# Altium PCB PCB_3U_RJ45.PCBDOC (part 2 of 2)
Units mil, origin at the board's own origin, x right, y up, seen from the top; angles counter-clockwise.
Board outline 2496.06 x 3937 mil, 4 copper layers (TopLayer, MidLayer2, Internal Plane 1, BottomLayer), stack 44.239 mil thick; 232 components, 140 nets, 824 pads, 257 vias.
Unrouted connection lines stored in the file: 421.
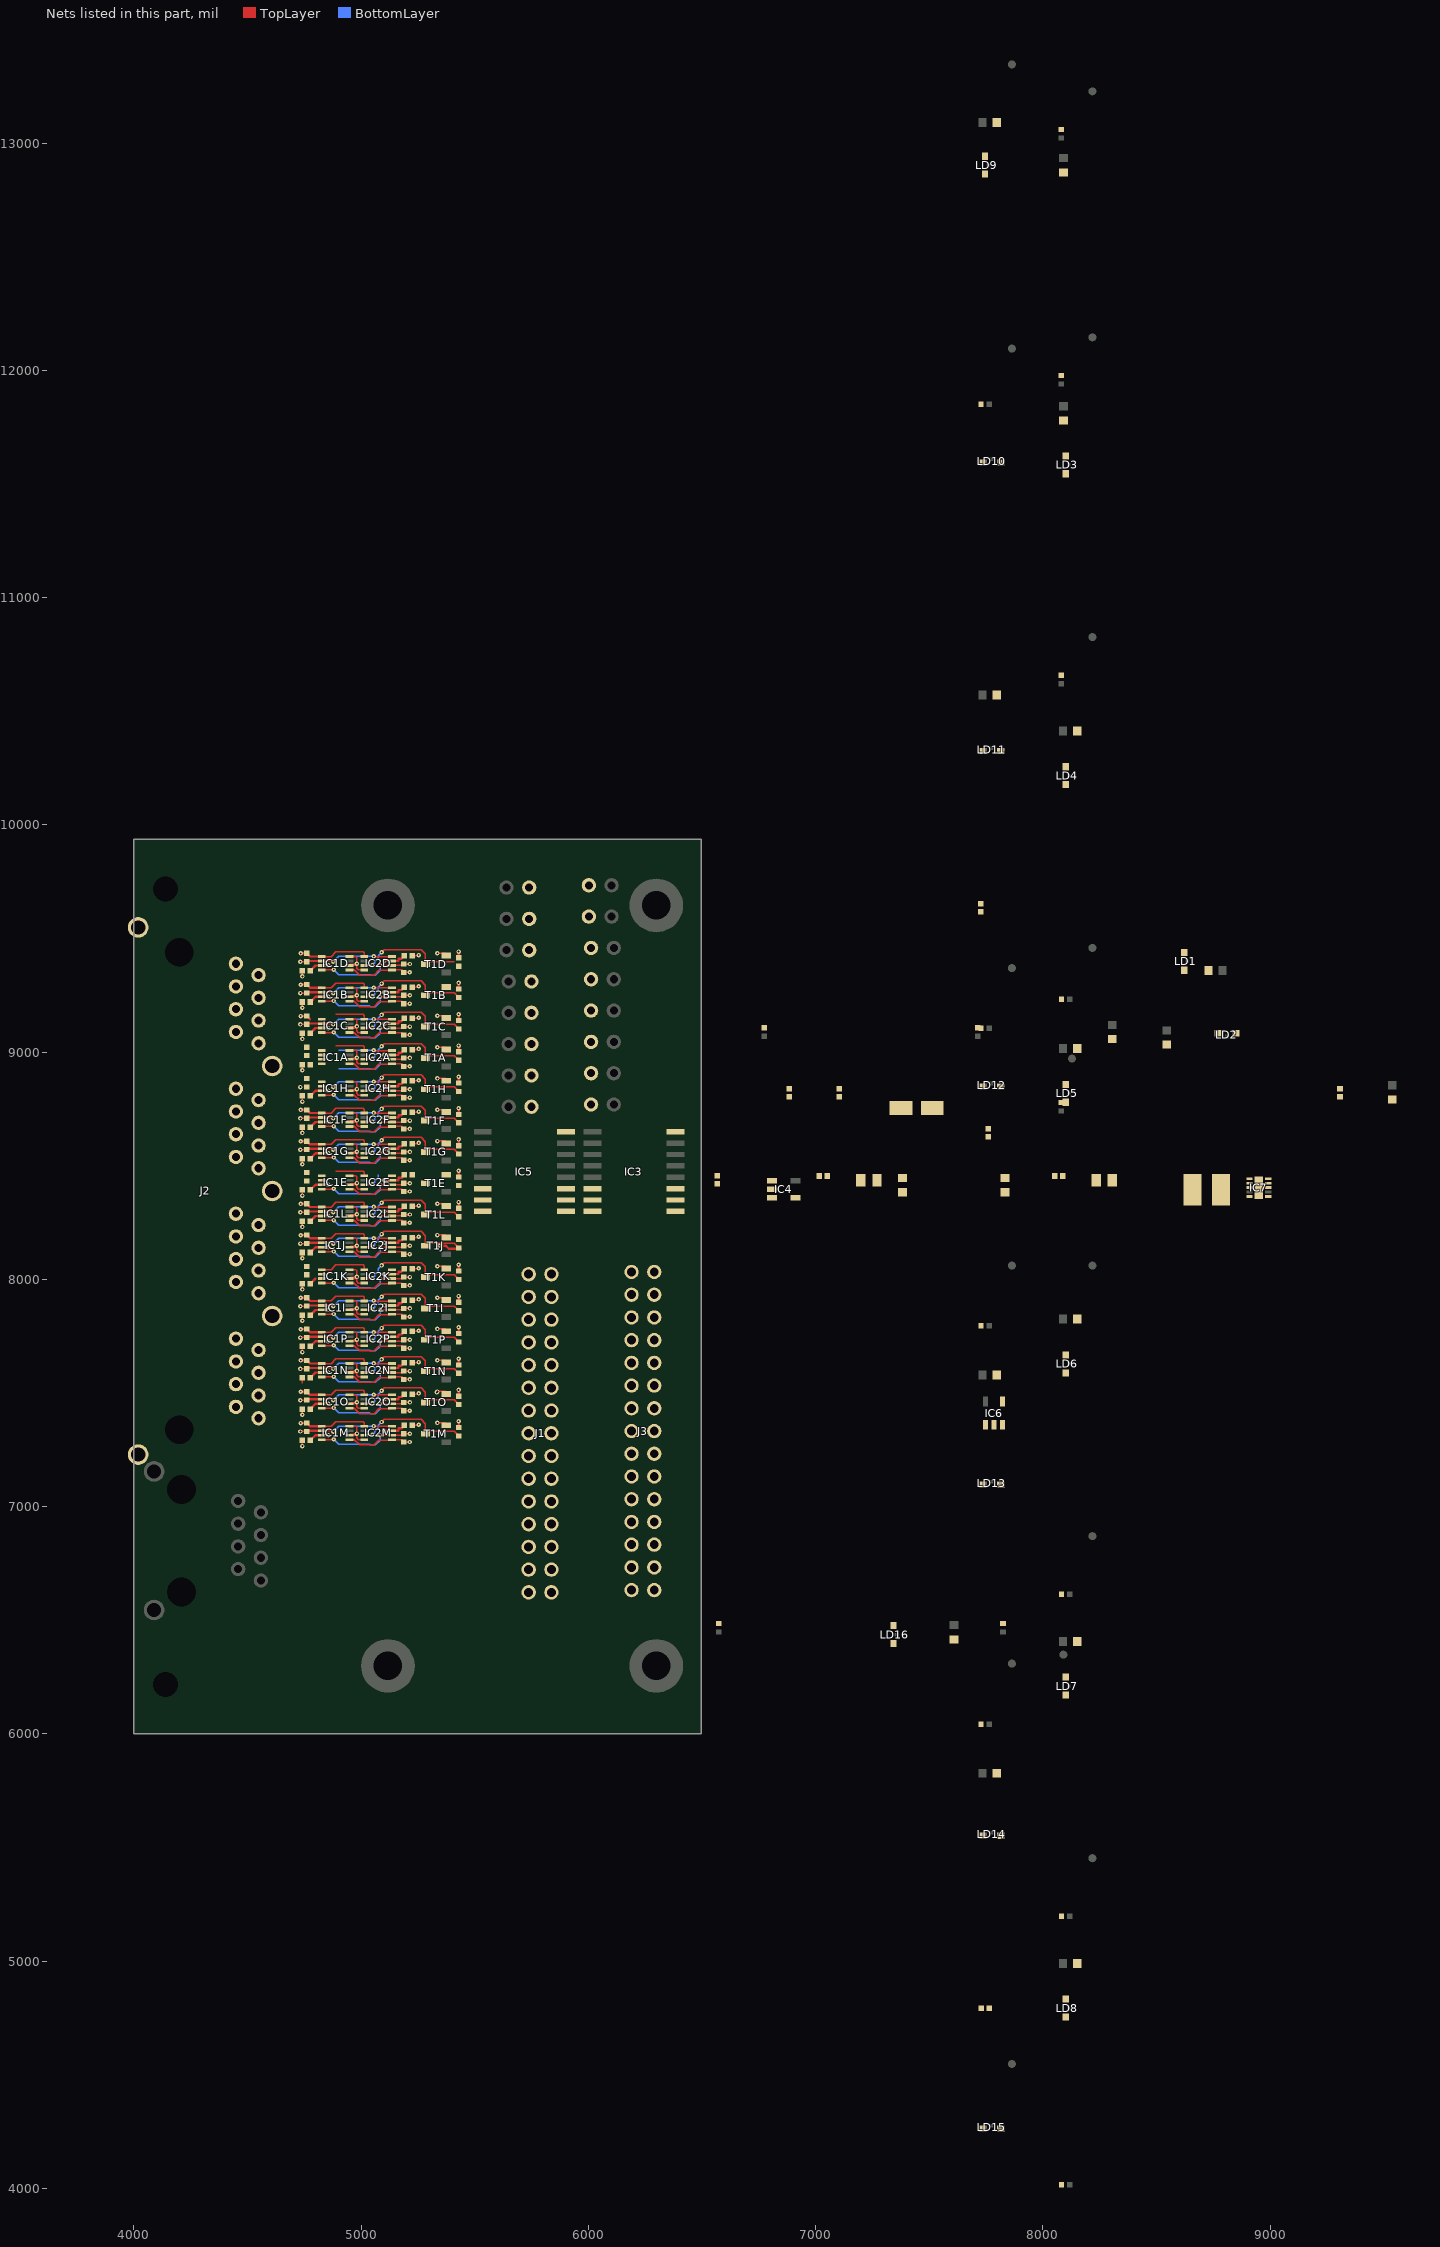
[diagram p3: the nets of this part, all layers, seen from the top]

## Via types
v1: diameter 19.68, hole 7.87, TopLayer to BottomLayer, 257 vias

## Nets (pads, with @x,y where several pads share a name; then routed paths per layer and width w, separated by ;. In a path a pad name is that pad's centre, name@x,y a point inside that pad or via, vN(x,y) a via of type N, cw(c..) or ccw(c..) an arc to the next point about the centre after c; other vN are vias at no path point) (continued)
GND: C1A.1 C1B.1 C1C.1 C1D.1 C1E.1 C1F.1 C1G.1 C1H.1 C1I.1 C1J.1 C1K.1 C1L.1 C1M.1 C1N.1 C1O.1 C1P.1 C2A.1 C2B.1 C2C.1 C2D.1 C2E.1 C2F.1 C2G.1 C2H.1 C2I.1 C2J.1 C2K.1 C2L.1 C2M.1 C2N.1 C2O.1 C2P.1 C3.1 C4.1 C5.1 C6.1 C7.1 C8.2 C9.1 C10.1 C11.1 C12.1 C13.1 C14.1 IC1A.2 IC1A.4 IC1B.2 IC1B.4 IC1C.2 IC1C.4 IC1D.2 IC1D.4 IC1E.2 IC1E.4 IC1F.2 IC1F.4 IC1G.2 IC1G.4 IC1H.2 IC1H.4 IC1I.2 IC1I.4 IC1J.2 IC1J.4 IC1K.2 IC1K.4 IC1L.2 IC1L.4 IC1M.2 IC1M.4 IC1N.2 IC1N.4 IC1O.2 IC1O.4 IC1P.2 IC1P.4 IC2A.4 IC2B.4 IC2C.4 IC2D.4 IC2E.4 IC2F.4 IC2G.4 IC2H.4 IC2I.4 IC2J.4 IC2K.4 IC2L.4 IC2M.4 IC2N.4 IC2O.4 IC2P.4 IC3.1 IC3.8 IC4.2 IC5.1 IC5.8 IC6.2 IC7.1 IC7.6 IC7.11 J1.1 J1.4 J1.7 J1.10 J1.13 J1.16 J1.19 J1.22 J1.25 J2.SH J3.1 J3.4 J3.7 J3.10 J3.13 J3.16 J3.19 J3.22 J3.25 R37.1 T1A.2 T1B.2 T1C.2 T1D.2 T1E.2 T1F.2 T1G.2 T1H.2 T1I.2 T1J.2 T1K.2 T1L.2 T1M.2 T1N.2 T1O.2 T1P.2 W1.2 W3.2 W5.2 W7.2 W9.2 W11.2 W13.2 W15.2 W17.2 W19.2 W21.2 W23.2 W25.2 W27.2 W29.2 W31.2 | length 4300.4
  TopLayer w6: C2M.1@4741.38,7291.61 4741.38,7267.33 v1(4742.09,7266.61) ; C2O.1@4741.38,7429.41 4741.38,7405.13 v1(4742.09,7404.41) ; 4741.38,7542.92 C2N.1@4741.38,7567.2 ; C2P.1@4741.38,7705 4741.38,7680.72 v1(4742.09,7680) ; C2I.1@4741.38,7842.8 4741.38,7818.51 v1(4742.09,7817.8) ; C2K.1@4741.38,7980.59 4741.38,7956.31 v1(4742.09,7955.59) ; C2J.1@4741.38,8118.39 4741.38,8094.1 v1(4742.09,8093.39) ; C2L.1@4741.38,8256.18 4741.38,8231.9 v1(4742.09,8231.18) ; C2E.1@4741.38,8393.98 4741.38,8369.69 v1(4742.09,8368.98) ; C2G.1@4741.38,8531.77 4741.38,8507.49 v1(4742.09,8506.77) ; C2F.1@4741.38,8669.57 4741.38,8645.28 v1(4742.09,8644.57) ; C2H.1@4741.38,8807.36 4741.38,8783.08 v1(4742.09,8782.36) ; C2A.1@4741.38,8945.16 4741.38,8920.87 v1(4742.09,8920.16) ; C2C.1@4741.38,9082.95 4741.38,9058.67 v1(4742.09,9057.95) ; C2B.1@4741.38,9220.75 4741.38,9196.46 v1(4742.09,9195.75) ; C2D.1@4741.38,9358.54 4741.38,9334.26 v1(4742.09,9333.54) ; IC1M.4@4949.12,7353.98 4977.57,7353.98 4980.09,7351.46 4980.09,7323.04 v1(4981.5,7321.63) v1@4980.09,7320.23 ; IC1O.4@4949.12,7491.78 4977.57,7491.78 4980.09,7489.25 4980.09,7460.83 v1(4981.5,7459.43) v1@4980.09,7458.03 ; IC1N.4@4949.12,7629.57 4977.57,7629.57 4980.09,7627.05 4980.09,7598.63 v1(4981.5,7597.23) v1@4980.09,7595.82 ; IC1P.4@4949.12,7767.37 4977.57,7767.37 4980.09,7764.84 4980.09,7736.42 v1(4981.5,7735.02) v1@4980.09,7733.62 ; IC1I.4@4949.12,7905.17 4977.57,7905.17 4980.09,7902.64 4980.09,7874.22 v1(4981.5,7872.82) v1@4980.09,7871.41 ; IC1K.4@4949.12,8042.96 4977.57,8042.96 4980.09,8040.43 4980.09,8012.01 v1(4981.5,8010.61) v1@4980.09,8009.21 ; IC1J.4@4949.12,8180.76 4977.57,8180.76 4980.09,8178.23 4980.09,8149.81 v1(4981.5,8148.41) v1@4980.09,8147.01 ; IC1L.4@4949.12,8318.55 4977.57,8318.55 4980.09,8316.02 4980.09,8287.6 v1(4981.5,8286.2) v1@4980.09,8284.8 ; IC1E.4@4949.12,8456.35 4977.57,8456.35 4980.09,8453.82 4980.09,8425.4 v1(4981.5,8424) v1@4980.09,8422.6 ; IC1G.4@4949.12,8594.14 4977.57,8594.14 4980.09,8591.61 4980.09,8563.19 v1(4981.5,8561.79) v1@4980.09,8560.39 ; IC1F.4@4949.12,8731.94 4977.57,8731.94 4980.09,8729.41 4980.09,8700.99 v1(4981.5,8699.59) v1@4980.09,8698.19 ; IC1H.4@4949.12,8869.73 4977.57,8869.73 4980.09,8867.2 4980.09,8838.78 v1(4981.5,8837.38) v1@4980.09,8835.98 ; IC1A.2@4949.12,8968.16 4974.48,8968.16 v1@4979.25,8972.94 ; IC1A.4@4949.12,9007.53 4977.57,9007.53 4980.09,9005 4980.09,8976.58 v1(4981.5,8975.18) v1@4980.09,8973.78 ; IC1C.4@4949.12,9145.32 4977.57,9145.32 4980.09,9142.8 4980.09,9114.38 v1(4981.5,9112.97) v1@4980.09,9111.57 ; IC1B.4@4949.12,9283.12 4977.57,9283.12 4980.09,9280.59 4980.09,9252.17 v1(4981.5,9250.77) v1@4980.09,9249.37 ; IC1D.4@4949.12,9420.91 4977.57,9420.91 4980.09,9418.39 4980.09,9389.97 v1(4981.5,9388.56) v1@4980.09,9387.16 ; IC1A.2@4953.9,8972.94 v1@4979.25,8972.94 ; IC2M.4@5014.07,7294.93 4987.62,7294.93 4980.09,7302.46 v1@4980.09,7320.23 ; IC2O.4@5014.07,7432.72 4987.62,7432.72 4980.09,7440.25 v1@4980.09,7458.03 ; IC2N.4@5014.07,7570.52 4987.62,7570.52 4980.09,7578.05 v1@4980.09,7595.82 ; IC2P.4@5014.07,7708.31 4987.62,7708.31 4980.09,7715.84 v1@4980.09,7733.62 ; IC2I.4@5014.07,7846.11 4987.62,7846.11 4980.09,7853.64 v1@4980.09,7871.41 ; IC2K.4@5014.07,7983.91 4987.62,7983.91 4980.09,7991.43 v1@4980.09,8009.21 ; IC2J.4@5014.07,8121.7 4987.62,8121.7 4980.09,8129.23 v1@4980.09,8147.01 ; IC2L.4@5014.07,8259.5 4987.62,8259.5 4980.09,8267.02 v1@4980.09,8284.8 ; IC2E.4@5014.07,8397.29 4987.62,8397.29 4980.09,8404.82 v1@4980.09,8422.6 ; IC2G.4@5014.07,8535.09 4987.62,8535.09 4980.09,8542.61 v1@4980.09,8560.39 ; IC2F.4@5014.07,8672.88 4987.62,8672.88 4980.09,8680.41 v1@4980.09,8698.19 ; IC2H.4@5014.07,8810.68 4987.62,8810.68 4980.09,8818.2 v1@4980.09,8835.98 ; IC2A.4@5014.07,8948.47 4987.62,8948.47 4980.09,8956 v1@4980.09,8973.78 ; IC2C.4@5014.07,9086.27 4987.62,9086.27 4980.09,9093.8 v1@4980.09,9111.57 ; IC2B.4@5014.07,9224.06 4987.62,9224.06 4980.09,9231.59 v1@4980.09,9249.37 ; IC2D.4@5014.07,9361.86 4987.62,9361.86 4980.09,9369.39 v1@4980.09,9387.16 ; C1M.1@5225.81,7357.46 5253.09,7357.46 5254.09,7358.46 v1(5254.09,7360.46) ; C1O.1@5225.81,7495.25 5253.09,7495.25 5254.09,7496.25 v1(5254.09,7498.25) ; C1N.1@5225.81,7633.05 5253.09,7633.05 5254.09,7634.05 v1(5254.09,7636.05) ; C1P.1@5225.81,7770.84 5253.09,7770.84 5254.09,7771.84 v1(5254.09,7773.84) ; C1I.1@5225.81,7908.64 5253.09,7908.64 5254.09,7909.64 v1(5254.09,7911.64) ; C1K.1@5225.81,8046.43 5253.09,8046.43 5254.09,8047.43 v1(5254.09,8049.43) ; C1J.1@5225.81,8184.23 5253.09,8184.23 5254.09,8185.23 v1(5254.09,8187.23) ; C1L.1@5225.81,8322.02 5253.09,8322.02 5254.09,8323.02 v1(5254.09,8325.02) ; C1G.1@5225.81,8597.61 5253.09,8597.61 5254.09,8598.61 v1(5254.09,8600.61) ; C1F.1@5225.81,8735.41 5253.09,8735.41 5254.09,8736.41 v1(5254.09,8738.41) ; C1H.1@5225.81,8873.2 5253.09,8873.2 5254.09,8874.2 v1(5254.09,8876.2) ; C1A.1@5225.81,9011 5253.09,9011 5254.09,9012 v1(5254.09,9014) ; C1C.1@5225.81,9148.8 5253.09,9148.8 5254.09,9149.8 v1(5254.09,9151.8) ; C1B.1@5225.81,9286.59 5253.09,9286.59 5254.09,9287.59 v1(5254.09,9289.59) ; C1D.1@5225.81,9424.39 5253.09,9424.39 5254.09,9425.39 v1(5254.09,9427.39) ; v1@5331.93,7503.55 v1(5332.65,7502.83) ; v1(5336.09,7368.46) 5336.5,7368.86 T1M.2@5373.37,7368.86 ; v1(5336.09,7506.25) 5336.5,7506.65 T1O.2@5373.37,7506.65 ; v1(5336.09,7644.05) 5336.5,7644.45 T1N.2@5373.37,7644.45 ; v1(5336.09,7781.84) 5336.5,7782.24 T1P.2@5373.37,7782.24 ; v1(5336.09,7919.64) 5336.5,7920.04 T1I.2@5373.37,7920.04 ; v1(5336.09,8057.43) 5336.5,8057.83 T1K.2@5373.37,8057.83 ; v1(5336.09,8333.02) 5336.5,8333.43 T1L.2@5373.37,8333.43 ; v1(5336.09,8608.61) 5336.5,8609.02 T1G.2@5373.37,8609.02 ; v1(5336.09,8746.41) 5336.5,8746.81 T1F.2@5373.37,8746.81 ; v1(5336.09,8884.2) 5336.5,8884.61 T1H.2@5373.37,8884.61 ; v1(5336.09,9022) 5336.5,9022.4 T1A.2@5373.37,9022.4 ; v1(5336.09,9159.8) 5336.5,9160.2 T1C.2@5373.37,9160.2 ; v1(5336.09,9435.39) 5336.5,9435.79 T1D.2@5373.37,9435.79 ; v1@4979.25,7319.39 4953.9,7319.39 IC1M.2@4949.12,7314.61 4974.48,7314.61 v1@4979.25,7319.39 ; v1@4979.25,7319.39 v1@4980.09,7320.23 ; v1@4979.25,7457.19 4974.48,7452.41 IC1O.2@4949.12,7452.41 4953.9,7457.19 v1@4979.25,7457.19 ; v1@4979.25,7457.19 v1@4980.09,7458.03 ; v1@4979.25,7594.98 4974.48,7590.2 IC1N.2@4949.12,7590.2 4953.9,7594.98 v1@4979.25,7594.98 ; v1@4979.25,7594.98 v1@4980.09,7595.82 ; v1@4979.25,7732.78 4974.48,7728 IC1P.2@4949.12,7728 4953.9,7732.78 v1@4979.25,7732.78 ; v1@4979.25,7732.78 v1@4980.09,7733.62 ; v1@4979.25,7870.57 4974.48,7865.8 IC1I.2@4949.12,7865.8 4953.9,7870.57 v1@4979.25,7870.57 ; v1@4979.25,7870.57 v1@4980.09,7871.41 ; v1@4979.25,8008.37 4974.48,8003.59 IC1K.2@4949.12,8003.59 4953.9,8008.37 v1@4979.25,8008.37 ; v1@4979.25,8008.37 v1@4980.09,8009.21 ; v1@4979.25,8146.17 4974.48,8141.39 IC1J.2@4949.12,8141.39 4953.9,8146.17 v1@4979.25,8146.17 ; v1@4979.25,8146.17 v1@4980.09,8147.01 ; v1@4979.25,8283.96 4974.48,8279.18 IC1L.2@4949.12,8279.18 4953.9,8283.96 v1@4979.25,8283.96 ; v1@4979.25,8283.96 v1@4980.09,8284.8 ; v1@4979.25,8421.76 4974.48,8416.98 IC1E.2@4949.12,8416.98 4953.9,8421.76 v1@4979.25,8421.76 ; v1@4979.25,8421.76 v1@4980.09,8422.6 ; v1@4979.25,8559.55 4974.48,8554.77 IC1G.2@4949.12,8554.77 4953.9,8559.55 v1@4979.25,8559.55 ; v1@4979.25,8559.55 v1@4980.09,8560.39 ; v1@4979.25,8697.35 4974.48,8692.57 IC1F.2@4949.12,8692.57 4953.9,8697.35 v1@4979.25,8697.35 ; v1@4979.25,8697.35 v1@4980.09,8698.19 ; v1@4979.25,8835.14 4974.48,8830.36 IC1H.2@4949.12,8830.36 4953.9,8835.14 v1@4979.25,8835.14 ; v1@4979.25,8835.14 v1@4980.09,8835.98 ; v1@4979.25,8972.94 v1@4980.09,8973.78 ; v1@4979.25,9110.73 4974.48,9105.95 IC1C.2@4949.12,9105.95 4953.9,9110.73 v1@4979.25,9110.73 ; v1@4979.25,9110.73 v1@4980.09,9111.57 ; v1@4979.25,9248.53 4974.48,9243.75 IC1B.2@4949.12,9243.75 4953.9,9248.53 v1@4979.25,9248.53 ; v1@4979.25,9248.53 v1@4980.09,9249.37 ; v1@4979.25,9386.32 4974.48,9381.54 IC1D.2@4949.12,9381.54 4953.9,9386.32 v1@4979.25,9386.32 ; v1@4979.25,9386.32 v1@4980.09,9387.16
I2C1_SCL: IC3.14 IC4.1 J1.27
I2C1_SDA: IC3.15 IC4.3 J1.26
I2C2_SCL: IC5.14 IC6.1 J3.27
I2C2_SDA: IC5.15 IC6.3 J3.26
LVDS1_N: IC1P.1 IC2P.5 J1.3 R2P.2 | length 288.6
  TopLayer w6: IC1P.1@4949.12,7708.31 4970.65,7708.31 4993.97,7685 5056.9,7685 5077.74,7705.84 5133.65,7705.84 IC2P.5@5136.12,7708.31 5178.12,7708.31 R2P.2@5188.09,7698.34 ; R2P.2@5188.09,7697.34 5213.59,7697.34 v1(5214.09,7697.84)
LVDS1_P: IC1P.8 IC2P.6 J1.2 R2P.1 | length 430
  TopLayer w6: IC1P.8@4827.07,7708.31 v1@4878.57,7708.31 ; v1(5083.25,7728) IC2P.6@5136.12,7728 5180.75,7728 R2P.1@5188.09,7735.35 ; R2P.1@5188.09,7734.35 v1(5214.6,7734.35)
  BottomLayer w6: v1(4880.09,7709.84) 4902.09,7687.84 5038.45,7687.84 5041.29,7685 5062.25,7685 5083.25,7706 v1(5083.25,7728)
LVDS2_N: IC1O.1 IC2O.5 J1.6 R2O.2 | length 288.6
  TopLayer w6: IC1O.1@4949.12,7432.72 4970.65,7432.72 4993.97,7409.41 5056.9,7409.41 5077.74,7430.25 5133.65,7430.25 IC2O.5@5136.12,7432.72 5178.12,7432.72 R2O.2@5188.09,7422.75 ; R2O.2@5188.09,7421.75 5213.59,7421.75 v1(5214.09,7422.25)
LVDS2_P: IC1O.8 IC2O.6 J1.5 R2O.1 | length 430
  TopLayer w6: IC1O.8@4827.07,7432.72 v1@4878.57,7432.72 ; v1(5083.25,7452.41) IC2O.6@5136.12,7452.41 5180.75,7452.41 R2O.1@5188.09,7459.76 ; R2O.1@5188.09,7458.76 v1(5214.6,7458.76)
  BottomLayer w6: v1(4880.09,7434.25) 4902.09,7412.25 5038.45,7412.25 5041.29,7409.41 5062.25,7409.41 5083.25,7430.41 v1(5083.25,7452.41)
LVDS3_N: IC1N.1 IC2N.5 J1.9 R2N.2 | length 288.6
  TopLayer w6: IC1N.1@4949.12,7570.52 4970.65,7570.52 4993.97,7547.2 5056.9,7547.2 5077.74,7568.05 5133.65,7568.05 IC2N.5@5136.12,7570.52 5178.12,7570.52 R2N.2@5188.09,7560.54 ; R2N.2@5188.09,7559.54 5213.59,7559.54 v1(5214.09,7560.05)
LVDS3_P: IC1N.8 IC2N.6 J1.8 R2N.1 | length 430
  TopLayer w6: IC1N.8@4827.07,7570.52 v1@4878.57,7570.52 ; v1(5083.25,7590.2) IC2N.6@5136.12,7590.2 5180.75,7590.2 R2N.1@5188.09,7597.55 ; R2N.1@5188.09,7596.55 v1(5214.6,7596.55)
  BottomLayer w6: v1(4880.09,7572.05) 4902.09,7550.05 5038.45,7550.05 5041.29,7547.2 5062.25,7547.2 5083.25,7568.2 v1(5083.25,7590.2)
LVDS4_N: IC1M.1 IC2M.5 J1.12 R2M.2 | length 288.6
  TopLayer w6: IC1M.1@4949.12,7294.93 4970.65,7294.93 4993.97,7271.61 5056.9,7271.61 5077.74,7292.46 5133.65,7292.46 IC2M.5@5136.12,7294.93 5178.12,7294.93 R2M.2@5188.09,7284.95 ; R2M.2@5188.09,7283.95 5213.59,7283.95 v1(5214.09,7284.46)
LVDS4_P: IC1M.8 IC2M.6 J1.11 R2M.1 | length 430
  TopLayer w6: IC1M.8@4827.07,7294.93 v1@4878.57,7294.93 ; v1(5083.25,7314.61) IC2M.6@5136.12,7314.61 5180.75,7314.61 R2M.1@5188.09,7321.96 ; R2M.1@5188.09,7320.96 v1(5214.6,7320.96)
  BottomLayer w6: v1(4880.09,7296.46) 4902.09,7274.46 5038.45,7274.46 5041.29,7271.61 5062.25,7271.61 5083.25,7292.61 v1(5083.25,7314.61)
LVDS5_N: IC1L.1 IC2L.5 J1.15 R2L.2 | length 288.6
  TopLayer w6: IC1L.1@4949.12,8259.5 4970.65,8259.5 4993.97,8236.18 5056.9,8236.18 5077.74,8257.02 5133.65,8257.02 IC2L.5@5136.12,8259.5 5178.12,8259.5 R2L.2@5188.09,8249.52 ; R2L.2@5188.09,8248.52 5213.59,8248.52 v1(5214.09,8249.02)
LVDS5_P: IC1L.8 IC2L.6 J1.14 R2L.1 | length 430
  TopLayer w6: IC1L.8@4827.07,8259.5 v1@4878.57,8259.5 ; v1(5083.25,8279.18) IC2L.6@5136.12,8279.18 5180.75,8279.18 R2L.1@5188.09,8286.53 ; R2L.1@5188.09,8285.53 v1(5214.6,8285.53)
  BottomLayer w6: v1(4880.09,8261.02) 4902.09,8239.02 5038.45,8239.02 5041.29,8236.18 5062.25,8236.18 5083.25,8257.18 v1(5083.25,8279.18)
LVDS6_N: IC1K.1 IC2K.5 J1.18 R2K.2 | length 288.6
  TopLayer w6: IC1K.1@4949.12,7983.91 4970.65,7983.91 4993.97,7960.59 5056.9,7960.59 5077.74,7981.43 5133.65,7981.43 IC2K.5@5136.12,7983.91 5178.12,7983.91 R2K.2@5188.09,7973.93 ; R2K.2@5188.09,7972.93 5213.59,7972.93 v1(5214.09,7973.43)
LVDS6_P: IC1K.8 IC2K.6 J1.17 R2K.1 | length 430
  TopLayer w6: IC1K.8@4827.07,7983.91 v1@4878.57,7983.91 ; v1(5083.25,8003.59) IC2K.6@5136.12,8003.59 5180.75,8003.59 R2K.1@5188.09,8010.94 ; R2K.1@5188.09,8009.94 v1(5214.6,8009.94)
  BottomLayer w6: v1(4880.09,7985.43) 4902.09,7963.43 5038.45,7963.43 5041.29,7960.59 5062.25,7960.59 5083.25,7981.59 v1(5083.25,8003.59)
LVDS7_N: IC1J.1 IC2J.5 J1.21 R2J.2 | length 288.6
  TopLayer w6: IC1J.1@4949.12,8121.7 4970.65,8121.7 4993.97,8098.39 5056.9,8098.39 5077.74,8119.23 5133.65,8119.23 IC2J.5@5136.12,8121.7 5178.12,8121.7 R2J.2@5188.09,8111.72 ; R2J.2@5188.09,8110.72 5213.59,8110.72 v1(5214.09,8111.23)
LVDS7_P: IC1J.8 IC2J.6 J1.20 R2J.1 | length 430
  TopLayer w6: IC1J.8@4827.07,8121.7 v1@4878.57,8121.7 ; v1(5083.25,8141.39) IC2J.6@5136.12,8141.39 5180.75,8141.39 R2J.1@5188.09,8148.73 ; R2J.1@5188.09,8147.73 v1(5214.6,8147.73)
  BottomLayer w6: v1(4880.09,8123.23) 4902.09,8101.23 5038.45,8101.23 5041.29,8098.39 5062.25,8098.39 5083.25,8119.39 v1(5083.25,8141.39)
LVDS8_N: IC1I.1 IC2I.5 J1.24 R2I.2 | length 288.6
  TopLayer w6: IC1I.1@4949.12,7846.11 4970.65,7846.11 4993.97,7822.8 5056.9,7822.8 5077.74,7843.64 5133.65,7843.64 IC2I.5@5136.12,7846.11 5178.12,7846.11 R2I.2@5188.09,7836.13 ; R2I.2@5188.09,7835.13 5213.59,7835.13 v1(5214.09,7835.64)
LVDS8_P: IC1I.8 IC2I.6 J1.23 R2I.1 | length 430
  TopLayer w6: IC1I.8@4827.07,7846.11 v1@4878.57,7846.11 ; v1(5083.25,7865.8) IC2I.6@5136.12,7865.8 5180.75,7865.8 R2I.1@5188.09,7873.14 ; R2I.1@5188.09,7872.14 v1(5214.6,7872.14)
  BottomLayer w6: v1(4880.09,7847.64) 4902.09,7825.64 5038.45,7825.64 5041.29,7822.8 5062.25,7822.8 5083.25,7843.8 v1(5083.25,7865.8)
LVDS9_N: IC1H.1 IC2H.5 J3.3 R2H.2 | length 288.6
  TopLayer w6: IC1H.1@4949.12,8810.68 4970.65,8810.68 4993.97,8787.36 5056.9,8787.36 5077.74,8808.2 5133.65,8808.2 IC2H.5@5136.12,8810.68 5178.12,8810.68 R2H.2@5188.09,8800.7 ; R2H.2@5188.09,8799.7 5213.59,8799.7 v1(5214.09,8800.2)
LVDS9_P: IC1H.8 IC2H.6 J3.2 R2H.1 | length 430
  TopLayer w6: IC1H.8@4827.07,8810.68 v1@4878.57,8810.68 ; v1(5083.25,8830.36) IC2H.6@5136.12,8830.36 5180.75,8830.36 R2H.1@5188.09,8837.71 ; R2H.1@5188.09,8836.71 v1(5214.6,8836.71)
  BottomLayer w6: v1(4880.09,8812.2) 4902.09,8790.2 5038.45,8790.2 5041.29,8787.36 5062.25,8787.36 5083.25,8808.36 v1(5083.25,8830.36)
LVDS10_N: IC1G.1 IC2G.5 J3.6 R2G.2 | length 288.6
  TopLayer w6: IC1G.1@4949.12,8535.09 4970.65,8535.09 4993.97,8511.77 5056.9,8511.77 5077.74,8532.61 5133.65,8532.61 IC2G.5@5136.12,8535.09 5178.12,8535.09 R2G.2@5188.09,8525.11 ; R2G.2@5188.09,8524.11 5213.59,8524.11 v1(5214.09,8524.61)
LVDS10_P: IC1G.8 IC2G.6 J3.5 R2G.1 | length 430
  TopLayer w6: IC1G.8@4827.07,8535.09 v1@4878.57,8535.09 ; v1(5083.25,8554.77) IC2G.6@5136.12,8554.77 5180.75,8554.77 R2G.1@5188.09,8562.12 ; R2G.1@5188.09,8561.12 v1(5214.6,8561.12)
  BottomLayer w6: v1(4880.09,8536.61) 4902.09,8514.61 5038.45,8514.61 5041.29,8511.77 5062.25,8511.77 5083.25,8532.77 v1(5083.25,8554.77)
LVDS11_N: IC1F.1 IC2F.5 J3.9 R2F.2 | length 288.6
  TopLayer w6: IC1F.1@4949.12,8672.88 4970.65,8672.88 4993.97,8649.57 5056.9,8649.57 5077.74,8670.41 5133.65,8670.41 IC2F.5@5136.12,8672.88 5178.12,8672.88 R2F.2@5188.09,8662.91 ; R2F.2@5188.09,8661.91 5213.59,8661.91 v1(5214.09,8662.41)
LVDS11_P: IC1F.8 IC2F.6 J3.8 R2F.1 | length 430
  TopLayer w6: IC1F.8@4827.07,8672.88 v1@4878.57,8672.88 ; v1(5083.25,8692.57) IC2F.6@5136.12,8692.57 5180.75,8692.57 R2F.1@5188.09,8699.91 ; R2F.1@5188.09,8698.91 v1(5214.6,8698.91)
  BottomLayer w6: v1(4880.09,8674.41) 4902.09,8652.41 5038.45,8652.41 5041.29,8649.57 5062.25,8649.57 5083.25,8670.57 v1(5083.25,8692.57)
LVDS12_N: IC1E.1 IC2E.5 J3.12 R2E.2 | length 287.9
  TopLayer w6: IC1E.1@4949.12,8397.29 4970.65,8397.29 4993.97,8373.98 5056.9,8373.98 5077.74,8394.82 5133.65,8394.82 IC2E.5@5136.12,8397.29 5178.12,8397.29 R2E.2@5188.09,8387.31 ; R2E.2@5188.09,8386.31 v1@5213.59,8386.31
  other v1: 5214.09,8386.82
LVDS12_P: IC1E.8 IC2E.6 J3.11 R2E.1 | length 430
  TopLayer w6: IC1E.8@4827.07,8397.29 v1@4878.57,8397.29 ; v1(5083.25,8416.98) IC2E.6@5136.12,8416.98 5180.75,8416.98 R2E.1@5188.09,8424.32 ; R2E.1@5188.09,8423.32 v1(5214.6,8423.32)
  BottomLayer w6: v1(4880.09,8398.82) 4902.09,8376.82 5038.45,8376.82 5041.29,8373.98 5062.25,8373.98 5083.25,8394.98 v1(5083.25,8416.98)
LVDS13_N: IC1D.1 IC2D.5 J3.15 R2D.2 | length 288.6
  TopLayer w6: IC1D.1@4949.12,9361.86 4970.65,9361.86 4993.97,9338.54 5056.9,9338.54 5077.74,9359.39 5133.65,9359.39 IC2D.5@5136.12,9361.86 5178.12,9361.86 R2D.2@5188.09,9351.88 ; R2D.2@5188.09,9350.88 5213.59,9350.88 v1(5214.09,9351.39)
LVDS13_P: IC1D.8 IC2D.6 J3.14 R2D.1 | length 430
  TopLayer w6: IC1D.8@4827.07,9361.86 v1@4878.57,9361.86 ; v1(5083.25,9381.54) IC2D.6@5136.12,9381.54 5180.75,9381.54 R2D.1@5188.09,9388.89 ; R2D.1@5188.09,9387.89 v1(5214.6,9387.89)
  BottomLayer w6: v1(4880.09,9363.39) 4902.09,9341.39 5038.45,9341.39 5041.29,9338.54 5062.25,9338.54 5083.25,9359.54 v1(5083.25,9381.54)
LVDS14_N: IC1C.1 IC2C.5 J3.18 R2C.2 | length 288.6
  TopLayer w6: IC1C.1@4949.12,9086.27 4970.65,9086.27 4993.97,9062.95 5056.9,9062.95 5077.74,9083.8 5133.65,9083.8 IC2C.5@5136.12,9086.27 5178.12,9086.27 R2C.2@5188.09,9076.29 ; R2C.2@5188.09,9075.29 5213.59,9075.29 v1(5214.09,9075.8)
LVDS14_P: IC1C.8 IC2C.6 J3.17 R2C.1 | length 430
  TopLayer w6: IC1C.8@4827.07,9086.27 v1@4878.57,9086.27 ; v1(5083.25,9105.95) IC2C.6@5136.12,9105.95 5180.75,9105.95 R2C.1@5188.09,9113.3 ; R2C.1@5188.09,9112.3 v1(5214.6,9112.3)
  BottomLayer w6: v1(4880.09,9087.8) 4902.09,9065.8 5038.45,9065.8 5041.29,9062.95 5062.25,9062.95 5083.25,9083.95 v1(5083.25,9105.95)
LVDS15_N: IC1B.1 IC2B.5 J3.21 R2B.2 | length 288.6
  TopLayer w6: IC1B.1@4949.12,9224.06 4970.65,9224.06 4993.97,9200.75 5056.9,9200.75 5077.74,9221.59 5133.65,9221.59 IC2B.5@5136.12,9224.06 5178.12,9224.06 R2B.2@5188.09,9214.09 ; R2B.2@5188.09,9213.09 5213.59,9213.09 v1(5214.09,9213.59)
LVDS15_P: IC1B.8 IC2B.6 J3.20 R2B.1 | length 430
  TopLayer w6: IC1B.8@4827.07,9224.06 v1@4878.57,9224.06 ; v1(5083.25,9243.75) IC2B.6@5136.12,9243.75 5180.75,9243.75 R2B.1@5188.09,9251.09 ; R2B.1@5188.09,9250.09 v1(5214.6,9250.09)
  BottomLayer w6: v1(4880.09,9225.59) 4902.09,9203.59 5038.45,9203.59 5041.29,9200.75 5062.25,9200.75 5083.25,9221.75 v1(5083.25,9243.75)
LVDS16_N: IC1A.1 IC2A.5 J3.24 R2A.2 | length 288.6
  TopLayer w6: IC1A.1@4949.12,8948.47 4970.65,8948.47 4993.97,8925.16 5056.9,8925.16 5077.74,8946 5133.65,8946 IC2A.5@5136.12,8948.47 5178.12,8948.47 R2A.2@5188.09,8938.5 ; R2A.2@5188.09,8937.5 5213.59,8937.5 v1(5214.09,8938)
LVDS16_P: IC1A.8 IC2A.6 J3.23 R2A.1 | length 347.4
  TopLayer w6: v1(5083.25,8968.16) IC2A.6@5136.12,8968.16 5180.75,8968.16 R2A.1@5188.09,8975.5 ; R2A.1@5188.09,8974.5 v1(5214.6,8974.5)
  BottomLayer w6: 4902.09,8928 5038.45,8928 5041.29,8925.16 5062.25,8925.16 5083.25,8946.16 v1(5083.25,8968.16)
NetIC1A_5: IC1A.5 IC2A.1 J2.8D R1A.1 | length 170.4
  TopLayer w6: 4889.09,9028 5009.09,9028 5014.07,9023.02 IC2A.1@5014.07,9007.53
  TopLayer w10: v1(5429.09,8477.98) 5430.09,8476.98 5430.09,8450.48
NetIC1A_6: IC1A.6 IC2A.8 J2.7D R1A.2 | length 235.5
  TopLayer w6: v1(5056.09,9008) 5056.94,9007.16 5135.75,9007.16 IC2A.8@5136.12,9007.53
  BottomLayer w6: 4901.09,9008 v1(5056.09,9008)
NetIC1B_5: IC1B.5 IC2B.1 J2.6D R1B.1 | length 312.1
  TopLayer w6: IC1B.5@4827.07,9283.12 4868.62,9283.12 4889.09,9303.59 5009.09,9303.59 5014.07,9298.61 IC2B.1@5014.07,9283.12
  TopLayer w10: v1(4734.09,9296.75) 4734.6,9297.25 R1B.1@4761.09,9297.25 4775.23,9283.12 IC1B.5@4827.07,9283.12
NetIC1B_6: IC1B.6 IC2B.8 J2.3D R1B.2 | length 409.6
  TopLayer w6: v1(4733.09,9259.75) 4733.59,9260.24 R1B.2@4761.09,9260.24 ; v1(5056.09,9283.59) 5056.94,9282.75 5135.75,9282.75 IC2B.8@5136.12,9283.12
  TopLayer w10: R1B.2@4767.75,9263.43 IC1B.6@4827.07,9263.43 4828.23,9264.59 4872.09,9264.59 v1(4877.09,9259.59)
  BottomLayer w6: v1(4877.09,9259.59) 4901.09,9283.59 v1(5056.09,9283.59)
NetIC1C_5: IC1C.5 IC2C.1 J2.4D R1C.1 | length 189.7
  TopLayer w6: 4889.09,9165.8 5009.09,9165.8 5014.07,9160.82 IC2C.1@5014.07,9145.32
  TopLayer w10: v1(4734.09,9158.95) 4734.6,9159.46 R1C.1@4761.09,9159.46 4775.23,9145.32
NetIC1C_6: IC1C.6 IC2C.8 J2.5D R1C.2 | length 409.6
  TopLayer w6: v1(4733.09,9121.95) 4733.59,9122.45 R1C.2@4761.09,9122.45 ; v1(5056.09,9145.8) 5056.94,9144.95 5135.75,9144.95 IC2C.8@5136.12,9145.32
  TopLayer w10: R1C.2@4767.75,9125.64 IC1C.6@4827.07,9125.64 4828.23,9126.8 4872.09,9126.8 v1(4877.09,9121.8)
  BottomLayer w6: v1(4877.09,9121.8) 4901.09,9145.8 v1(5056.09,9145.8)
NetIC1D_5: IC1D.5 IC2D.1 J2.2D R1D.1 | length 312.1
  TopLayer w6: IC1D.5@4827.07,9420.91 4868.62,9420.91 4889.09,9441.39 5009.09,9441.39 5014.07,9436.41 IC2D.1@5014.07,9420.91
  TopLayer w10: v1(4734.09,9434.54) 4734.6,9435.05 R1D.1@4761.09,9435.05 4775.23,9420.91 IC1D.5@4827.07,9420.91
NetIC1D_6: IC1D.6 IC2D.8 J2.1D R1D.2 | length 409.6
  TopLayer w6: v1(4733.09,9397.54) 4733.59,9398.04 R1D.2@4761.09,9398.04 ; v1(5056.09,9421.39) 5056.94,9420.54 5135.75,9420.54 IC2D.8@5136.12,9420.91
  TopLayer w10: R1D.2@4767.75,9401.23 IC1D.6@4827.07,9401.23 4828.23,9402.39 4872.09,9402.39 v1(4877.09,9397.39)
  BottomLayer w6: v1(4877.09,9397.39) 4901.09,9421.39 v1(5056.09,9421.39)
NetIC1E_5: IC1E.5 IC2E.1 J2.8C R1E.1
NetIC1E_6: IC1E.6 IC2E.8 J2.7C R1E.2
NetIC1F_5: IC1F.5 IC2F.1 J2.6C R1F.1 | length 312.1
  TopLayer w6: IC1F.5@4827.07,8731.94 4868.62,8731.94 4889.09,8752.41 5009.09,8752.41 5014.07,8747.43 IC2F.1@5014.07,8731.94
  TopLayer w10: v1(4734.09,8745.57) 4734.6,8746.07 R1F.1@4761.09,8746.07 4775.23,8731.94 IC1F.5@4827.07,8731.94
NetIC1F_6: IC1F.6 IC2F.8 J2.3C R1F.2 | length 409.6
  TopLayer w6: v1(4733.09,8708.57) 4733.59,8709.06 R1F.2@4761.09,8709.06 ; v1(5056.09,8732.41) 5056.94,8731.57 5135.75,8731.57 IC2F.8@5136.12,8731.94
  TopLayer w10: R1F.2@4767.75,8712.25 IC1F.6@4827.07,8712.25 4828.23,8713.41 4872.09,8713.41 v1(4877.09,8708.41)
  BottomLayer w6: v1(4877.09,8708.41) 4901.09,8732.41 v1(5056.09,8732.41)
NetIC1G_5: IC1G.5 IC2G.1 J2.4C R1G.1 | length 312.1
  TopLayer w6: IC1G.5@4827.07,8594.14 4868.62,8594.14 4889.09,8614.61 5009.09,8614.61 5014.07,8609.64 IC2G.1@5014.07,8594.14
  TopLayer w10: v1(4734.09,8607.77) 4734.6,8608.28 R1G.1@4761.09,8608.28 4775.23,8594.14 IC1G.5@4827.07,8594.14
NetIC1G_6: IC1G.6 IC2G.8 J2.5C R1G.2 | length 409.6
  TopLayer w6: v1(4733.09,8570.77) 4733.59,8571.27 R1G.2@4761.09,8571.27 ; v1(5056.09,8594.61) 5056.94,8593.77 5135.75,8593.77 IC2G.8@5136.12,8594.14
  TopLayer w10: R1G.2@4767.75,8574.46 IC1G.6@4827.07,8574.46 4828.23,8575.61 4872.09,8575.61 v1(4877.09,8570.61)
  BottomLayer w6: v1(4877.09,8570.61) 4901.09,8594.61 v1(5056.09,8594.61)
NetIC1H_5: IC1H.5 IC2H.1 J2.2C R1H.1
NetIC1H_6: IC1H.6 IC2H.8 J2.1C R1H.2 | length 277.2
  TopLayer w6: v1(4733.09,8846.36) v1@4733.59,8846.86 ; v1(5056.09,8870.2) 5056.94,8869.36 5135.75,8869.36 IC2H.8@5136.12,8869.73
  TopLayer w10: v1@4872.09,8851.2 v1(4877.09,8846.2)
  BottomLayer w6: v1(4877.09,8846.2) 4901.09,8870.2 v1(5056.09,8870.2)
NetIC1I_5: IC1I.5 IC2I.1 J2.8B R1I.1 | length 312.1
  TopLayer w6: IC1I.5@4827.07,7905.17 4868.62,7905.17 4889.09,7925.64 5009.09,7925.64 5014.07,7920.66 IC2I.1@5014.07,7905.17
  TopLayer w10: v1(4734.09,7918.8) 4734.6,7919.3 R1I.1@4761.09,7919.3 4775.23,7905.17 IC1I.5@4827.07,7905.17
NetIC1I_6: IC1I.6 IC2I.8 J2.7B R1I.2 | length 409.6
  TopLayer w6: v1(4733.09,7881.8) 4733.59,7882.29 R1I.2@4761.09,7882.29 ; v1(5056.09,7905.64) 5056.94,7904.8 5135.75,7904.8 IC2I.8@5136.12,7905.17
  TopLayer w10: R1I.2@4767.75,7885.48 IC1I.6@4827.07,7885.48 4828.23,7886.64 4872.09,7886.64 v1(4877.09,7881.64)
  BottomLayer w6: v1(4877.09,7881.64) 4901.09,7905.64 v1(5056.09,7905.64)
NetIC1J_5: IC1J.5 IC2J.1 J2.6B R1J.1 | length 312.1
  TopLayer w6: IC1J.5@4827.07,8180.76 4868.62,8180.76 4889.09,8201.23 5009.09,8201.23 5014.07,8196.25 IC2J.1@5014.07,8180.76
  TopLayer w10: v1(4734.09,8194.39) 4734.6,8194.89 R1J.1@4761.09,8194.89 4775.23,8180.76 IC1J.5@4827.07,8180.76
NetIC1J_6: IC1J.6 IC2J.8 J2.3B R1J.2 | length 409.6
  TopLayer w6: v1(4733.09,8157.39) 4733.59,8157.88 R1J.2@4761.09,8157.88 ; v1(5056.09,8181.23) 5056.94,8180.39 5135.75,8180.39 IC2J.8@5136.12,8180.76
  TopLayer w10: R1J.2@4767.75,8161.07 IC1J.6@4827.07,8161.07 4828.23,8162.23 4872.09,8162.23 v1(4877.09,8157.23)
  BottomLayer w6: v1(4877.09,8157.23) 4901.09,8181.23 v1(5056.09,8181.23)
NetIC1K_5: IC1K.5 IC2K.1 J2.4B R1K.1
NetIC1K_6: IC1K.6 IC2K.8 J2.5B R1K.2 | length 37.4
  TopLayer w6: v1(5336.09,8195.23) 5336.5,8195.63 5373.37,8195.63
NetIC1L_5: IC1L.5 IC2L.1 J2.2B R1L.1 | length 312.1
  TopLayer w6: IC1L.5@4827.07,8318.55 4868.62,8318.55 4889.09,8339.02 5009.09,8339.02 5014.07,8334.05 IC2L.1@5014.07,8318.55
  TopLayer w10: v1(4734.09,8332.18) 4734.6,8332.68 R1L.1@4761.09,8332.68 4775.23,8318.55 IC1L.5@4827.07,8318.55
NetIC1L_6: IC1L.6 IC2L.8 J2.1B R1L.2 | length 409.6
  TopLayer w6: v1(4733.09,8295.18) 4733.59,8295.68 R1L.2@4761.09,8295.68 ; v1(5056.09,8319.02) 5056.94,8318.18 5135.75,8318.18 IC2L.8@5136.12,8318.55
  TopLayer w10: R1L.2@4767.75,8298.87 IC1L.6@4827.07,8298.87 4828.23,8300.02 4872.09,8300.02 v1(4877.09,8295.02)
  BottomLayer w6: v1(4877.09,8295.02) 4901.09,8319.02 v1(5056.09,8319.02)
NetIC1M_5: IC1M.5 IC2M.1 J2.8A R1M.1 | length 312.1
  TopLayer w6: IC1M.5@4827.07,7353.98 4868.62,7353.98 4889.09,7374.46 5009.09,7374.46 5014.07,7369.48 IC2M.1@5014.07,7353.98
  TopLayer w10: v1(4734.09,7367.61) 4734.6,7368.12 R1M.1@4761.09,7368.12 4775.23,7353.98 IC1M.5@4827.07,7353.98
NetIC1M_6: IC1M.6 IC2M.8 J2.7A R1M.2 | length 409.6
  TopLayer w6: v1(4733.09,7330.61) 4733.59,7331.11 R1M.2@4761.09,7331.11 ; v1(5056.09,7354.46) 5056.94,7353.61 5135.75,7353.61 IC2M.8@5136.12,7353.98
  TopLayer w10: R1M.2@4767.75,7334.3 IC1M.6@4827.07,7334.3 4828.23,7335.46 4872.09,7335.46 v1(4877.09,7330.46)
  BottomLayer w6: v1(4877.09,7330.46) 4901.09,7354.46 v1(5056.09,7354.46)
NetIC1N_5: IC1N.5 IC2N.1 J2.6A R1N.1 | length 312.1
  TopLayer w6: IC1N.5@4827.07,7629.57 4868.62,7629.57 4889.09,7650.05 5009.09,7650.05 5014.07,7645.07 IC2N.1@5014.07,7629.57
  TopLayer w10: v1(4734.09,7643.2) 4734.6,7643.71 R1N.1@4761.09,7643.71 4775.23,7629.57 IC1N.5@4827.07,7629.57
NetIC1N_6: IC1N.6 IC2N.8 J2.3A R1N.2 | length 409.6
  TopLayer w6: v1(4733.09,7606.2) 4733.59,7606.7 R1N.2@4761.09,7606.7 ; v1(5056.09,7630.05) 5056.94,7629.2 5135.75,7629.2 IC2N.8@5136.12,7629.57
  TopLayer w10: R1N.2@4767.75,7609.89 IC1N.6@4827.07,7609.89 4828.23,7611.05 4872.09,7611.05 v1(4877.09,7606.05)
  BottomLayer w6: v1(4877.09,7606.05) 4901.09,7630.05 v1(5056.09,7630.05)
NetIC1O_5: IC1O.5 IC2O.1 J2.4A R1O.1 | length 312.1
  TopLayer w6: IC1O.5@4827.07,7491.78 4868.62,7491.78 4889.09,7512.25 5009.09,7512.25 5014.07,7507.28 IC2O.1@5014.07,7491.78
  TopLayer w10: v1(4734.09,7505.41) 4734.6,7505.91 R1O.1@4761.09,7505.91 4775.23,7491.78 IC1O.5@4827.07,7491.78
NetIC1O_6: IC1O.6 IC2O.8 J2.5A R1O.2 | length 409.6
  TopLayer w6: v1(4733.09,7468.41) 4733.59,7468.91 R1O.2@4761.09,7468.91 ; v1(5056.09,7492.25) 5056.94,7491.41 5135.75,7491.41 IC2O.8@5136.12,7491.78
  TopLayer w10: R1O.2@4767.75,7472.09 IC1O.6@4827.07,7472.09 4828.23,7473.25 4872.09,7473.25 v1(4877.09,7468.25)
  BottomLayer w6: v1(4877.09,7468.25) 4901.09,7492.25 v1(5056.09,7492.25)
NetIC1P_5: IC1P.5 IC2P.1 J2.2A R1P.1 | length 312.1
  TopLayer w6: IC1P.5@4827.07,7767.37 4868.62,7767.37 4889.09,7787.84 5009.09,7787.84 5014.07,7782.87 IC2P.1@5014.07,7767.37
  TopLayer w10: v1(4734.09,7781) 4734.6,7781.5 R1P.1@4761.09,7781.5 4775.23,7767.37 IC1P.5@4827.07,7767.37
NetIC1P_6: IC1P.6 IC2P.8 J2.1A R1P.2 | length 409.6
  TopLayer w6: v1(4733.09,7744) 4733.59,7744.5 R1P.2@4761.09,7744.5 ; v1(5056.09,7767.84) 5056.94,7767 5135.75,7767 IC2P.8@5136.12,7767.37
  TopLayer w10: R1P.2@4767.75,7747.69 IC1P.6@4827.07,7747.69 4828.23,7748.84 4872.09,7748.84 v1(4877.09,7743.84)
  BottomLayer w6: v1(4877.09,7743.84) 4901.09,7767.84 v1(5056.09,7767.84)
NetIC2A_3: IC2A.3 R3A.1 T1A.3 | length 499.7
  TopLayer w6: IC2A.3@5014.07,8968.16 5047.25,8968.16 v1(5049.09,8970) ; v1(5090.09,9026) 5102.09,9038 5264.09,9038 5282.82,9019.28 5282.82,8985 5409.75,8985 R3A.1@5424.84,8969.91
  BottomLayer w6: v1(5049.09,8970) 5056.09,8977 5061.09,8977 5061.09,8986.35 5074.94,9000.2 5074.94,9010.84 v1(5090.09,9026)
NetIC2B_3: IC2B.3 R3B.1 T1B.3 | length 642.2
  TopLayer w6: 4889.09,8476.82 5009.09,8476.82 5014.07,8471.84 5014.07,8456.35 ; IC2B.3@5014.07,9243.75 5047.25,9243.75 v1(5049.09,9245.59) ; v1(5090.09,9301.59) 5102.09,9313.59 5264.09,9313.59 5282.82,9294.87 5282.82,9260.59 5409.75,9260.59 R3B.1@5424.84,9245.5
  BottomLayer w6: v1(5049.09,9245.59) 5056.09,9252.59 5061.09,9252.59 5061.09,9261.94 5074.94,9275.79 5074.94,9286.43 v1(5090.09,9301.59)
NetIC2C_3: IC2C.3 R3C.1 T1C.3 | length 499.7
  TopLayer w6: IC2C.3@5014.07,9105.95 5047.25,9105.95 v1(5049.09,9107.8) ; v1(5090.09,9163.8) 5102.09,9175.8 5264.09,9175.8 5282.82,9157.07 5282.82,9122.8 5409.75,9122.8 R3C.1@5424.84,9107.7
  BottomLayer w6: v1(5049.09,9107.8) 5056.09,9114.8 5061.09,9114.8 5061.09,9124.15 5074.94,9137.99 5074.94,9148.64 v1(5090.09,9163.8)
NetIC2D_3: IC2D.3 R3D.1 T1D.3 | length 478.4
  TopLayer w6: IC2D.3@5014.07,9381.54 5047.25,9381.54 v1(5049.09,9383.39) ; v1(5090.09,9439.39) 5102.09,9451.39 5264.09,9451.39 5282.82,9432.66 5282.82,9398.39 5409.75,9398.39
  BottomLayer w6: v1(5049.09,9383.39) 5056.09,9390.39 5061.09,9390.39 5061.09,9399.74 5074.94,9413.58 5074.94,9424.23 v1(5090.09,9439.39)
NetIC2E_3: IC2E.3 R3E.1 T1E.3 | length 90.3
  TopLayer w6: IC2E.3@5014.07,8416.98 5047.25,8416.98 v1(5049.09,8418.82)
  BottomLayer w6: v1(5049.09,8418.82) 5056.09,8425.82 5061.09,8425.82 5061.09,8435.17 5074.94,8449.01 5074.94,8459.66
NetIC2F_3: IC2F.3 R3F.1 T1F.3 | length 499.7
  TopLayer w6: IC2F.3@5014.07,8692.57 5047.25,8692.57 v1(5049.09,8694.41) ; v1(5090.09,8750.41) 5102.09,8762.41 5264.09,8762.41 5282.82,8743.68 5282.82,8709.41 5409.75,8709.41 R3F.1@5424.84,8694.32
  BottomLayer w6: v1(5049.09,8694.41) 5056.09,8701.41 5061.09,8701.41 5061.09,8710.76 5074.94,8724.6 5074.94,8735.25 v1(5090.09,8750.41)
NetIC2G_3: IC2G.3 R3G.1 T1G.3 | length 499.7
  TopLayer w6: IC2G.3@5014.07,8554.77 5047.25,8554.77 v1(5049.09,8556.61) ; v1(5090.09,8612.61) 5102.09,8624.61 5264.09,8624.61 5282.82,8605.89 5282.82,8571.61 5409.75,8571.61 R3G.1@5424.84,8556.52
  BottomLayer w6: v1(5049.09,8556.61) 5056.09,8563.61 5061.09,8563.61 5061.09,8572.97 5074.94,8586.81 5074.94,8597.46 v1(5090.09,8612.61)
NetIC2H_3: IC2H.3 R3H.1 T1H.3 | length 499.7
  TopLayer w6: IC2H.3@5014.07,8830.36 5047.25,8830.36 v1(5049.09,8832.2) ; v1(5090.09,8888.2) 5102.09,8900.2 5264.09,8900.2 5282.82,8881.48 5282.82,8847.2 5409.75,8847.2 R3H.1@5424.84,8832.11
  BottomLayer w6: v1(5049.09,8832.2) 5056.09,8839.2 5061.09,8839.2 5061.09,8848.56 5074.94,8862.4 5074.94,8873.05 v1(5090.09,8888.2)
NetIC2I_3: IC2I.3 R3I.1 T1I.3 | length 499.7
  TopLayer w6: IC2I.3@5014.07,7865.8 5047.25,7865.8 v1(5049.09,7867.64) ; v1(5090.09,7923.64) 5102.09,7935.64 5264.09,7935.64 5282.82,7916.91 5282.82,7882.64 5409.75,7882.64 R3I.1@5424.84,7867.54
  BottomLayer w6: v1(5049.09,7867.64) 5056.09,7874.64 5061.09,7874.64 5061.09,7883.99 5074.94,7897.83 5074.94,7908.48 v1(5090.09,7923.64)
NetIC2J_3: IC2J.3 R3J.1 T1J.3 | length 811.8
  TopLayer w6: 4827.07,8042.96 4868.62,8042.96 4889.09,8063.43 5009.09,8063.43 5014.07,8058.46 5014.07,8042.96 ; IC2J.3@5014.07,8141.39 5047.25,8141.39 v1(5049.09,8143.23) ; v1(5090.09,8199.23) 5102.09,8211.23 5264.09,8211.23 5282.82,8192.5 5282.82,8158.23 5409.75,8158.23 R3J.1@5424.84,8143.13
  TopLayer w10: v1(5344.09,8148.11) 5344.59,8148.61 5371.09,8148.61 5385.22,8134.48 R3J.1@5437.06,8134.48
  BottomLayer w6: v1(5049.09,8143.23) 5056.09,8150.23 5061.09,8150.23 5061.09,8159.58 5074.94,8173.42 5074.94,8184.07 v1(5090.09,8199.23)
NetIC2K_3: IC2K.3 R3K.1 T1K.3 | length 499.7
  TopLayer w6: IC2K.3@5014.07,8003.59 5047.25,8003.59 v1(5049.09,8005.43) ; v1(5090.09,8061.43) 5102.09,8073.43 5264.09,8073.43 5282.82,8054.71 5282.82,8020.43 5409.75,8020.43 R3K.1@5424.84,8005.34
  BottomLayer w6: v1(5049.09,8005.43) 5056.09,8012.43 5061.09,8012.43 5061.09,8021.79 5074.94,8035.63 5074.94,8046.28 v1(5090.09,8061.43)
NetIC2L_3: IC2L.3 R3L.1 T1L.3 | length 499.7
  TopLayer w6: IC2L.3@5014.07,8279.18 5047.25,8279.18 v1(5049.09,8281.02) ; v1(5090.09,8337.02) 5102.09,8349.02 5264.09,8349.02 5282.82,8330.3 5282.82,8296.02 5409.75,8296.02 R3L.1@5424.84,8280.93
  BottomLayer w6: v1(5049.09,8281.02) 5056.09,8288.02 5061.09,8288.02 5061.09,8297.38 5074.94,8311.22 5074.94,8321.87 v1(5090.09,8337.02)
NetIC2M_3: IC2M.3 R3M.1 T1M.3 | length 499.7
  TopLayer w6: IC2M.3@5014.07,7314.61 5047.25,7314.61 v1(5049.09,7316.46) ; v1(5090.09,7372.46) 5102.09,7384.46 5264.09,7384.46 5282.82,7365.73 5282.82,7331.46 5409.75,7331.46 R3M.1@5424.84,7316.36
  BottomLayer w6: v1(5049.09,7316.46) 5056.09,7323.46 5061.09,7323.46 5061.09,7332.81 5074.94,7346.65 5074.94,7357.3 v1(5090.09,7372.46)
NetIC2N_3: IC2N.3 R3N.1 T1N.3 | length 499.7
  TopLayer w6: IC2N.3@5014.07,7590.2 5047.25,7590.2 v1(5049.09,7592.05) ; v1(5090.09,7648.05) 5102.09,7660.05 5264.09,7660.05 5282.82,7641.32 5282.82,7607.05 5409.75,7607.05 R3N.1@5424.84,7591.95
  BottomLayer w6: v1(5049.09,7592.05) 5056.09,7599.05 5061.09,7599.05 5061.09,7608.4 5074.94,7622.24 5074.94,7632.89 v1(5090.09,7648.05)
NetIC2O_3: IC2O.3 R3O.1 T1O.3 | length 499.7
  TopLayer w6: IC2O.3@5014.07,7452.41 5047.25,7452.41 v1(5049.09,7454.25) ; v1(5090.09,7510.25) 5102.09,7522.25 5264.09,7522.25 5282.82,7503.53 5282.82,7469.25 5409.75,7469.25 R3O.1@5424.84,7454.16
  BottomLayer w6: v1(5049.09,7454.25) 5056.09,7461.25 5061.09,7461.25 5061.09,7470.6 5074.94,7484.45 5074.94,7495.09 v1(5090.09,7510.25)
NetIC2P_3: IC2P.3 R3P.1 T1P.3 | length 499.7
  TopLayer w6: IC2P.3@5014.07,7728 5047.25,7728 v1(5049.09,7729.84) ; v1(5090.09,7785.84) 5102.09,7797.84 5264.09,7797.84 5282.82,7779.12 5282.82,7744.84 5409.75,7744.84 R3P.1@5424.84,7729.75
  BottomLayer w6: v1(5049.09,7729.84) 5056.09,7736.84 5061.09,7736.84 5061.09,7746.2 5074.94,7760.04 5074.94,7770.69 v1(5090.09,7785.84)
NetIC7_5: IC7.5 R36.1 R37.2
NetIC7_9: IC7.9 L1.1
NetLD1_1: LD1.1 R4.1
NetLD2_1: LD2.1 R6.1
NetLD3_1: LD3.1 R8.1
NetLD4_1: LD4.1 R10.1
NetLD5_1: LD5.1 R12.1
NetLD6_1: LD6.1 R14.1
NetLD7_1: LD7.1 R16.1
NetLD8_1: LD8.1 R18.1
NetLD9_1: LD9.1 R20.1
NetLD10_1: LD10.1 R22.1
NetLD11_1: LD11.1 R24.1
NetLD12_1: LD12.1 R26.1
NetLD13_1: LD13.1 R28.1
NetLD14_1: LD14.1 R30.1
NetLD15_1: LD15.1 R32.1
NetLD16_1: LD16.1 R34.1
P3V3: C1A.2 C1B.2 C1C.2 C1D.2 C1E.2 C1F.2 C1G.2 C1H.2 C1I.2 C1J.2 C1K.2 C1L.2 C1M.2 C1N.2 C1O.2 C1P.2 C2A.2 C2B.2 C2C.2 C2D.2 C2E.2 C2F.2 C2G.2 C2H.2 C2I.2 C2J.2 C2K.2 C2L.2 C2M.2 C2N.2 C2O.2 C2P.2 C5.2 C6.2 C7.2 C8.1 C11.2 C12.2 IC1A.7 IC1B.7 IC1C.7 IC1D.7 IC1E.7 IC1F.7 IC1G.7 IC1H.7 IC1I.7 IC1J.7 IC1K.7 IC1L.7 IC1M.7 IC1N.7 IC1O.7 IC1P.7 IC2A.7 IC2B.7 IC2C.7 IC2D.7 IC2E.7 IC2F.7 IC2G.7 IC2H.7 IC2I.7 IC2J.7 IC2K.7 IC2L.7 IC2M.7 IC2N.7 IC2O.7 IC2P.7 IC7.8 IC7.10 L1.2 LD1.2 LD2.2 LD3.2 LD4.2 LD5.2 LD6.2 LD7.2 LD8.2 LD9.2 LD10.2 LD11.2 LD12.2 LD13.2 LD14.2 LD15.2 LD16.2 R3A.2 R3B.2 R3C.2 R3D.2 R3E.2 R3F.2 R3G.2 R3H.2 R3I.2 R3J.2 R3K.2 R3L.2 R3M.2 R3N.2 R3O.2 R3P.2 R5.2 R7.2 R9.2 R11.2 R13.2 R15.2 R17.2 R19.2 R21.2 R23.2 R25.2 R27.2 R29.2 R31.2 R33.2 R35.2 R36.2 | length 3315.8
  TopLayer w10: C2M.2@4776.81,7291.61 4799.81,7314.61 IC1M.7@4827.07,7314.61 v1(4856.25,7314.61) ; C2O.2@4776.81,7429.41 4799.81,7452.41 IC1O.7@4827.07,7452.41 v1(4856.25,7452.41) ; C2N.2@4776.81,7567.2 4799.81,7590.2 IC1N.7@4827.07,7590.2 v1(4856.25,7590.2) ; C2P.2@4776.81,7705 4799.81,7728 IC1P.7@4827.07,7728 v1(4856.25,7728) ; C2I.2@4776.81,7842.8 4799.81,7865.8 IC1I.7@4827.07,7865.8 v1(4856.25,7865.8) ; C2K.2@4776.81,7980.59 4799.81,8003.59 ; C2J.2@4776.81,8118.39 4799.81,8141.39 IC1J.7@4827.07,8141.39 v1(4856.25,8141.39) ; C2L.2@4776.81,8256.18 4799.81,8279.18 IC1L.7@4827.07,8279.18 v1(4856.25,8279.18) ; C2E.2@4776.81,8393.98 4799.81,8416.98 IC1E.7@4827.07,8416.98 v1(4856.25,8416.98) ; C2G.2@4776.81,8531.77 4799.81,8554.77 IC1G.7@4827.07,8554.77 v1(4856.25,8554.77) ; C2F.2@4776.81,8669.57 4799.81,8692.57 IC1F.7@4827.07,8692.57 v1(4856.25,8692.57) ; C2H.2@4776.81,8807.36 4799.81,8830.36 IC1H.7@4827.07,8830.36 v1(4856.25,8830.36) ; C2C.2@4776.81,9082.95 4799.81,9105.95 IC1C.7@4827.07,9105.95 v1(4856.25,9105.95) ; C2B.2@4776.81,9220.75 4799.81,9243.75 IC1B.7@4827.07,9243.75 v1(4856.25,9243.75) ; C2D.2@4776.81,9358.54 4799.81,9381.54 IC1D.7@4827.07,9381.54 v1(4856.25,9381.54) ; v1(5102.94,7334.3) IC2M.7@5136.12,7334.3 5164.89,7334.3 5164.89,7344.38 5177.3,7344.38 C1M.2@5190.38,7357.46 ; v1(5102.94,7472.09) IC2O.7@5136.12,7472.09 5164.89,7472.09 5164.89,7482.17 5177.3,7482.17 C1O.2@5190.38,7495.25 ; v1(5102.94,7609.89) IC2N.7@5136.12,7609.89 5164.89,7609.89 5164.89,7619.97 5177.3,7619.97 C1N.2@5190.38,7633.05 ; v1(5102.94,7747.69) IC2P.7@5136.12,7747.69 5164.89,7747.69 5164.89,7757.76 5177.3,7757.76 C1P.2@5190.38,7770.84 ; v1(5102.94,7885.48) IC2I.7@5136.12,7885.48 5164.89,7885.48 5164.89,7895.56 5177.3,7895.56 C1I.2@5190.38,7908.64 ; v1(5102.94,8023.28) IC2K.7@5136.12,8023.28 5164.89,8023.28 5164.89,8033.35 5177.3,8033.35 C1K.2@5190.38,8046.43 ; v1(5102.94,8161.07) IC2J.7@5136.12,8161.07 5164.89,8161.07 5164.89,8171.15 5177.3,8171.15 C1J.2@5190.38,8184.23 ; v1(5102.94,8298.87) IC2L.7@5136.12,8298.87 5164.89,8298.87 5164.89,8308.94 5177.3,8308.94 C1L.2@5190.38,8322.02 ; v1(5102.94,8436.66) IC2E.7@5136.12,8436.66 5164.89,8436.66 5164.89,8446.74 5177.3,8446.74 C1E.2@5190.38,8459.82 ; v1(5102.94,8574.46) IC2G.7@5136.12,8574.46 5164.89,8574.46 5164.89,8584.54 5177.3,8584.54 C1G.2@5190.38,8597.61 ; v1(5102.94,8712.25) IC2F.7@5136.12,8712.25 5164.89,8712.25 5164.89,8722.33 5177.3,8722.33 C1F.2@5190.38,8735.41 ; v1(5102.94,8850.05) IC2H.7@5136.12,8850.05 5164.89,8850.05 5164.89,8860.13 5177.3,8860.13 C1H.2@5190.38,8873.2 ; v1(5102.94,8987.84) IC2A.7@5136.12,8987.84 5164.89,8987.84 5164.89,8997.92 5177.3,8997.92 C1A.2@5190.38,9011 ; v1(5102.94,9125.64) IC2C.7@5136.12,9125.64 5164.89,9125.64 5164.89,9135.72 5177.3,9135.72 C1C.2@5190.38,9148.8 ; v1(5102.94,9263.43) IC2B.7@5136.12,9263.43 5164.89,9263.43 5164.89,9273.51 5177.3,9273.51 C1B.2@5190.38,9286.59 ; v1(5102.94,9401.23) IC2D.7@5136.12,9401.23 5164.89,9401.23 5164.89,9411.31 5177.3,9411.31 C1D.2@5190.38,9424.39 ; v1(5429.09,7375.61) 5430.09,7374.61 R3M.2@5430.09,7348.12 ; v1(5429.09,7513.41) 5430.09,7512.41 R3O.2@5430.09,7485.91 ; v1(5429.09,7651.2) 5430.09,7650.2 R3N.2@5430.09,7623.71 ; v1(5429.09,7789) 5430.09,7788 R3P.2@5430.09,7761.5 ; v1(5429.09,7926.8) 5430.09,7925.8 R3I.2@5430.09,7899.3 ; v1(5429.09,8064.59) 5430.09,8063.59 R3K.2@5430.09,8037.09 ; v1(5429.09,8340.18) 5430.09,8339.18 R3L.2@5430.09,8312.68 ; v1(5429.09,8615.77) 5430.09,8614.77 R3G.2@5430.09,8588.28 ; v1(5429.09,8753.57) 5430.09,8752.57 R3F.2@5430.09,8726.07 ; v1(5429.09,8891.36) 5430.09,8890.36 R3H.2@5430.09,8863.87 ; v1(5429.09,9029.16) 5430.09,9028.16 R3A.2@5430.09,9001.66 ; v1(5429.09,9166.95) 5430.09,9165.95 R3C.2@5430.09,9139.46 ; v1(5429.09,9304.75) 5430.09,9303.75 R3B.2@5430.09,9277.25 ; v1(5429.09,9442.54) 5430.09,9441.54 R3D.2@5430.09,9415.05
P3V3_MP: IC3.2 IC3.3 IC5.2 IC5.3
P3V3_MP1: C3.2 C4.2 IC3.16 IC4.4 J1.30
P3V3_MP2: C9.2 C10.2 IC5.16 IC6.4 J3.30
P12V0: C13.2 C14.2 IC7.2 IC7.3 J1.28 J1.29 J3.28 J3.29
pads on no net: IC2A.2 IC2B.2 IC2C.2 IC2D.2 IC2E.2 IC2F.2 IC2G.2 IC2H.2 IC2I.2 IC2J.2 IC2K.2 IC2L.2 IC2M.2 IC2N.2 IC2O.2 IC2P.2 IC3.13 IC4.5 IC5.13 IC6.5 IC7.4 IC7.7 J2.M1 J2.M2 J4.1 J4.2 J4.3 J4.4 J4.5 J4.6 J4.7 J4.8 J4.M1 J4.M2 J4.SHIELD LD1.3 LD2.3 LD3.3 LD4.3 LD5.3 LD6.3 LD7.3 LD8.3 LD9.3 LD10.3 LD11.3 LD12.3 LD13.3 LD14.3 LD15.3 LD16.3

## Polygon pours and split planes (outlines as drawn)
no net on Internal Plane 1 (split plane): 6475.97,6020.1 4020.1,6020.1 4020.1,9916.9 6475.97,9916.9

## Keep-outs
KeepOutLayer:
  lines w8: 4065,6319 4065,9619 4240,9619 4240,9819 6456.69,9819 6456.69,6119 4240,6119 4240,6319 4065,6319

## Silkscreen, mask and mechanical layers (free items; w line width, h text height)
TopOverlay:
  circle w10: c4140,9717 r112.5
  circle w10: c4140,6217 r112.5
Mechanical1:
  the board outline again, w20

## Dimensions
3980,6217 to 4000,6000 on Mechanical4
4140,5980 to 4000,6000 on Mechanical4

## Text inside footprints (layer, text, board x,y; h text height)
J1: TopOverlay "30" at 5892.4,6647.84 h40 r270; Mechanical14 "30" at 5892.4,6647.84 h40 r270
J3: TopOverlay "30" at 6345.16,6657.68 h40 r270; Mechanical14 "30" at 6345.16,6657.68 h40 r270
J4: TopOverlay "1" at 4485.38,7087.4 h47.24 r90; Mechanical14 "1" at 4485.38,7087.4 h47.24 r90